# Altium PCB RASPBERRY_PI_PICO.PcbDoc
Units mil, origin at the board's own origin, x right, y up, seen from the top; angles counter-clockwise.
Board outline 2127.95 x 2360.24 mil, 2 copper layers (Top Layer, Bottom Layer); 5 components, 28 nets, 75 pads, 0 vias.
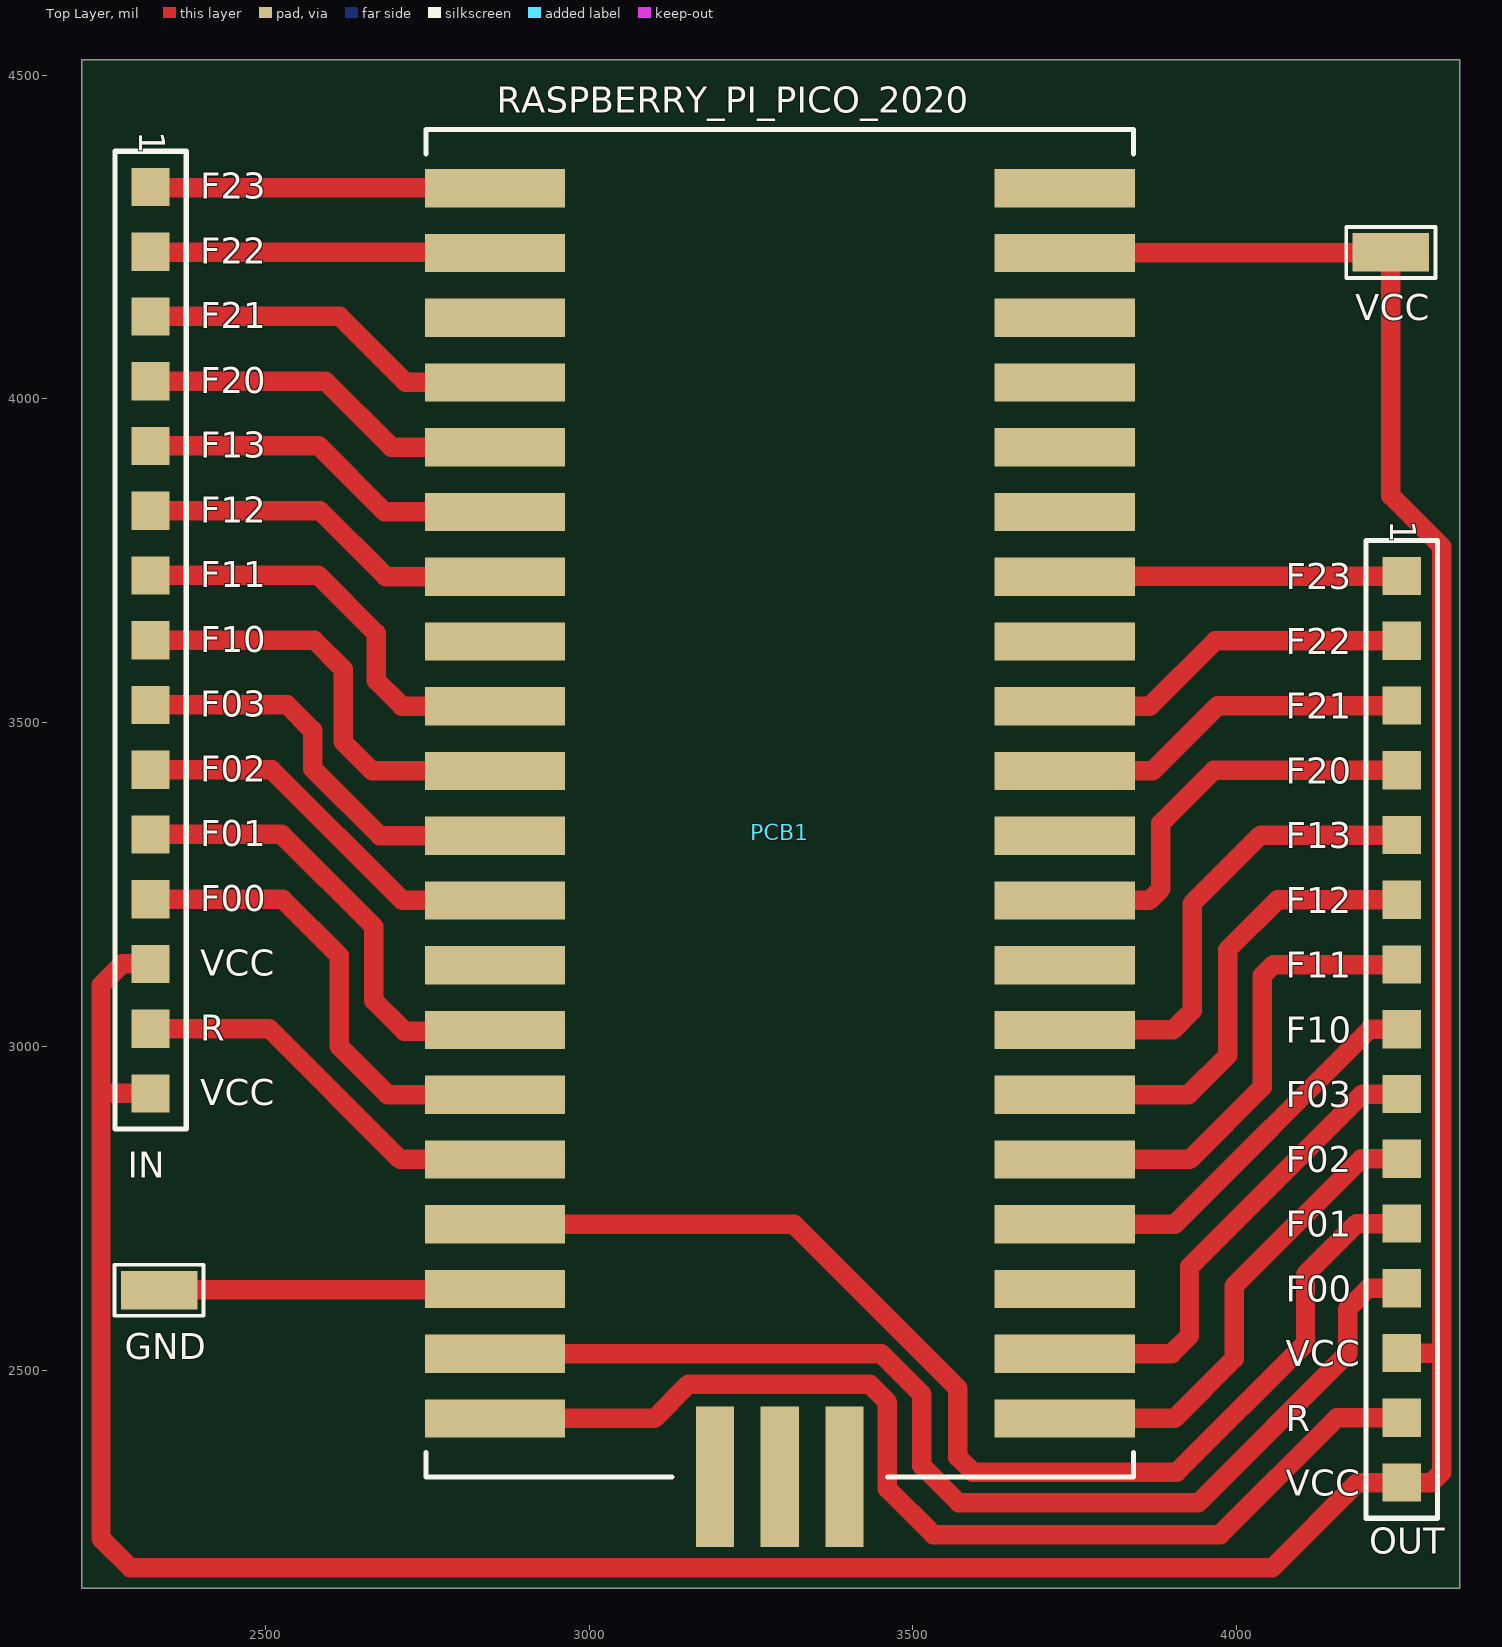
[diagram p0: Top Layer view]
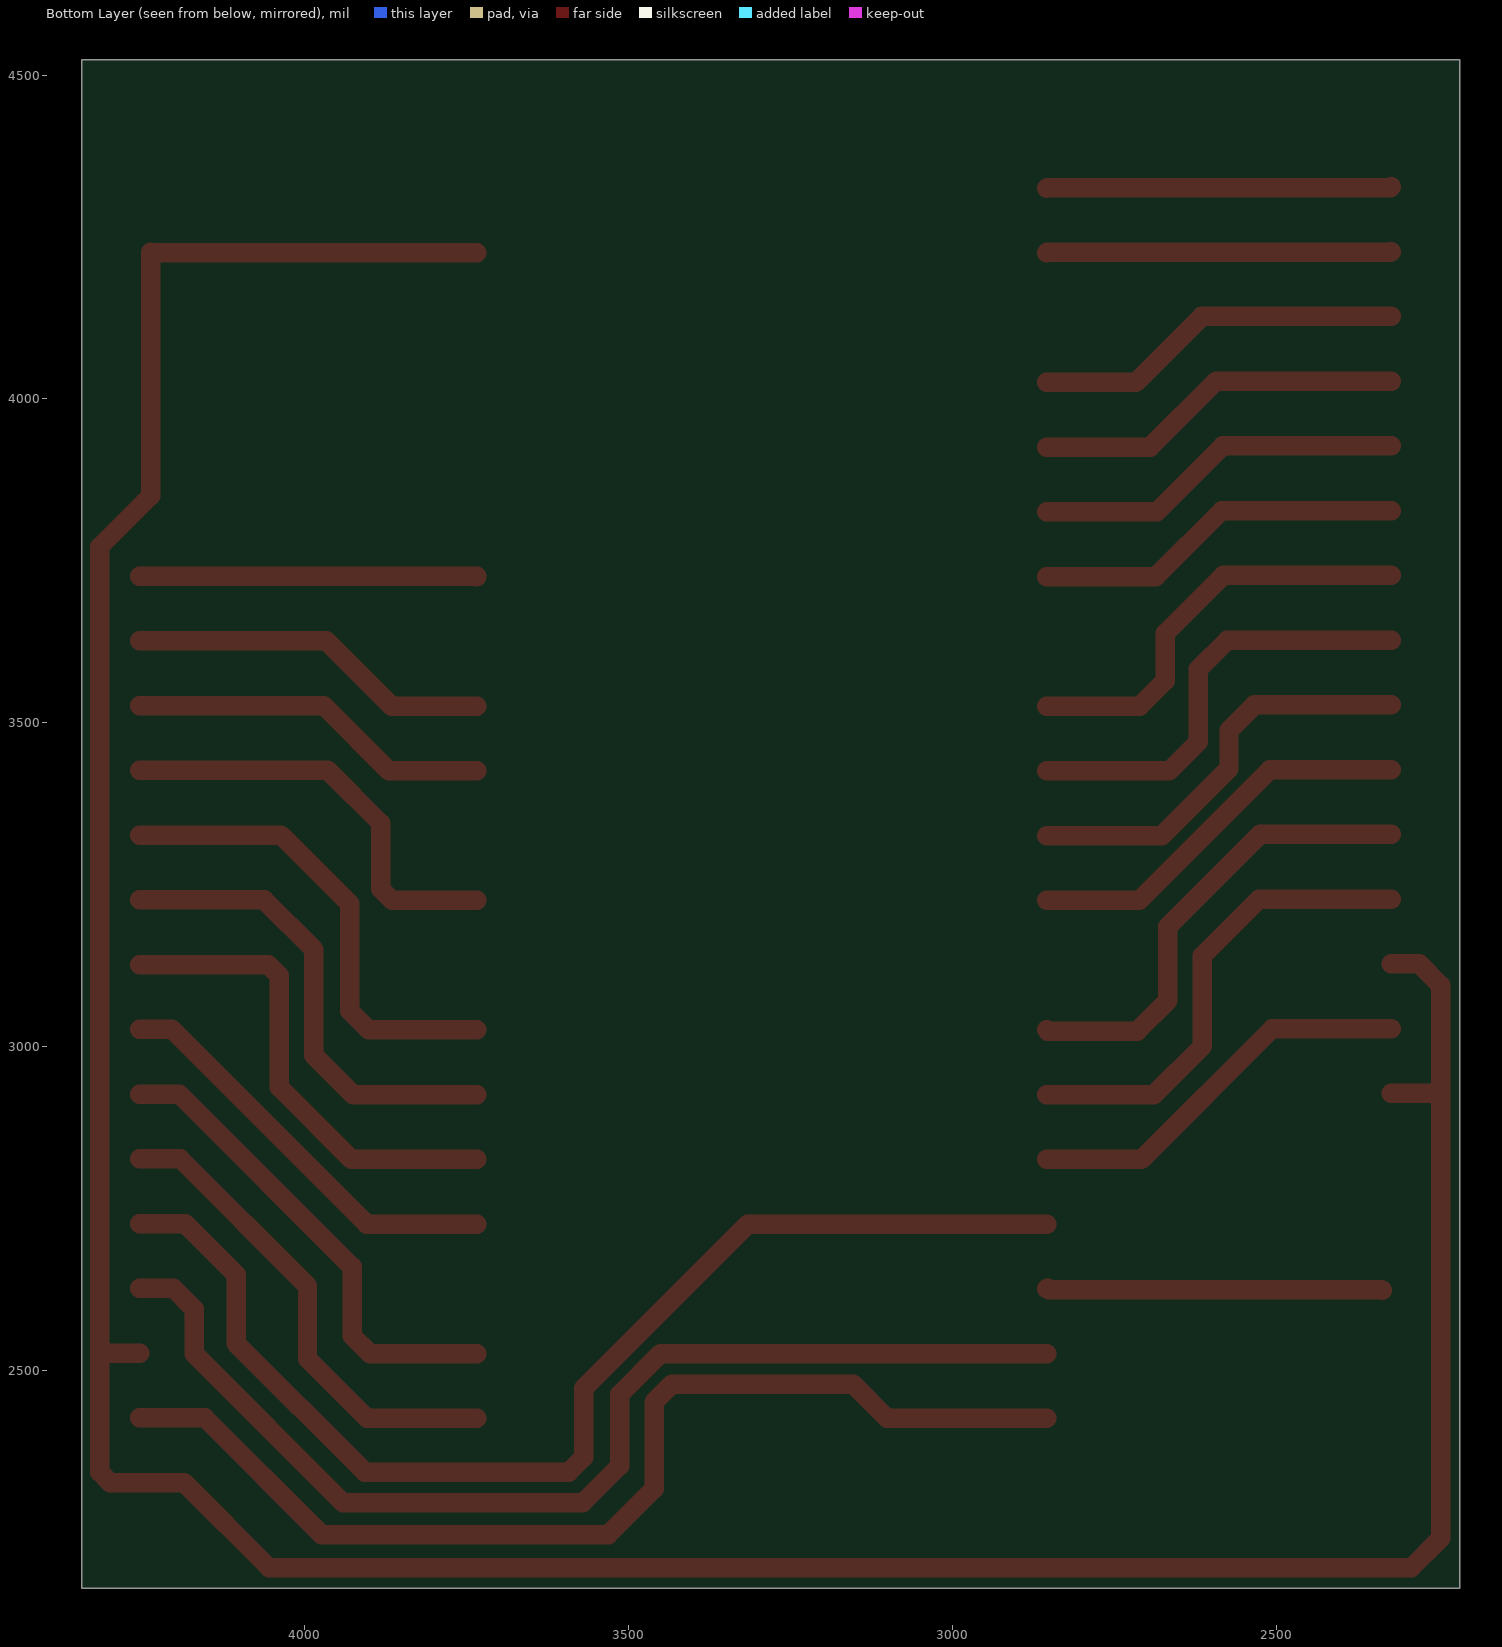
[diagram p1: Bottom Layer view, seen from below]

## Layer stack, top to bottom
Top Solder: solder mask 0.4, Solder Resist, Dk 3.5
Top Layer: signal copper 1.4
Dielectric 1: dielectric 12.6, FR-4, Dk 4.8
Bottom Layer: signal copper 1.4
Bottom Solder: solder mask 0.4, Solder Resist, Dk 3.5

## Board outline
2216.54,2163.39 4344.49,2163.39 4344.49,4523.62 2216.53,4523.62

## Design rules (kind name [scope] priority, off if disabled: settings)
BoardOutlineClearance [All] p1: gap=10.24 ignorepadtopadclearanceinfootprint=FALSE
Clearance [All] p1: gap=8 ignorepadtopadclearanceinfootprint=FALSE
MinimumSolderMaskSliver [All] p1: minsoldermaskwidth=3
PolygonConnect [All] p1: connectstyle=Relief reliefconductorwidth=10 reliefentries=4 polygonreliefangle="90 Angle" airgapwidth=10
RoutingVias [All] p1: holewidth=28 width=50 viastyle="Through Hole" minholewidth=28 minwidth=50 maxholewidth=28 maxwidth=50
SilkToSilkClearance [All] p1: silktosilkclearance=6.02
SilkToSolderMaskClearance [IsPad] p1: minsilkscreentomaskgap=6.02 clearancetoexposedcopper=TRUE
SolderMaskExpansion [All] p1: expansion=4 istentingtop=FALSE
Width [All] p1: maxlimit=40 minlimit=10 preferedwidth=40
27 further rules are at their usual default settings.

## Components (designator, comment, footprint, x,y, rotation, side; value= is the part's Value field where it differs from the comment)
GND "SMD" SMD_PAD 2335.78,2623.37 r0 top
IN "F_CONN_SMD" F_CONNECTOR_SMD 2322.57,3627.36 r270 top
OUT "F_CONN_SMD" F_CONNECTOR_SMD 4255.14,3026.42 r270 top
PCB1 "RASPBERRY_PI_PICO_2020" RASPBERRY_PI_PICO_2020\ 3294.42,3330.46 r0 top
VCC "SMD" SMD_PAD 4238.19,4226.38 r0 top

## Footprints (in the part's own frame and the unit in brackets; to place one, negate y for a bottom-side part, rotate by r counter-clockwise, add the part's x,y. Pads: shape width x height; smd on the part's side, far side on the other; paste and mask are expansions set on the pad)
F_CONNECTOR_SMD [mm]
  rect 1.5x1.5 smd: 1(-17.78,0) 2(-15.24,0) 3(-12.7,0) 4(-10.16,0) 5(-7.62,0) 6(-5.08,0) 7(-2.54,0) 8(0,0) 9(2.54,0) 10(5.08,0) 11(7.62,0) 12(10.16,0) 13(12.7,0) 14(15.24,0) 15(17.78,0)
  silkscreen extent -19.18,-1.4 19.18,1.4
RASPBERRY_PI_PICO_2020\ [mm]
  rect 5.5x1.5 smd: 1(-11.176,25.273) 2(-11.176,22.733) 3(-11.176,20.193) 4(-11.176,17.653) 5(-11.176,15.113) 6(-11.176,12.573) 7(-11.176,10.033) 8(-11.176,7.493) 9(-11.176,4.953) 10(-11.176,2.413) 11(-11.176,-0.127) 12(-11.176,-2.667) 13(-11.176,-5.207) 14(-11.176,-7.747) 15(-11.176,-10.287) 16(-11.176,-12.827) 17(-11.176,-15.367) 18(-11.176,-17.907) 19(-11.176,-20.447) 20(-11.176,-22.987) 24(11.176,-22.987) 25(11.176,-20.447) 26(11.176,-17.907) 27(11.176,-15.367) 28(11.176,-12.827) 29(11.176,-10.287) 30(11.176,-7.747) 31(11.176,-5.207) 32(11.176,-2.667) 33(11.176,-0.127) 34(11.176,2.413) 35(11.176,4.953) 36(11.176,7.493) 37(11.176,10.033) 38(11.176,12.573) 39(11.176,15.113) 40(11.176,17.653) 41(11.176,20.193) 42(11.176,22.733) 43(11.176,25.273)
  rect 1.5x5.5 smd: 21(-2.54,-25.273) 22(0,-25.273) 23(2.54,-25.273)
  silkscreen extent -13.88,-25.29 13.88,27.57
SMD_PAD [mm]
  rect 3x1.5 smd: 1(0,0)
  silkscreen extent -1.75,-1 1.75,1

## Part data
GND VCC: library part SMD_PAD
IN OUT: library part F_CONNECTOR_SMD

## Nets (pads, with @x,y where several pads share a name; then routed paths per layer and width w, separated by ;. In a path a pad name is that pad's centre, name@x,y a point inside that pad or via, vN(x,y) a via of type N, cw(c..) or ccw(c..) an arc to the next point about the centre after c; other vN are vias at no path point)
F00_IN: IN.12 PCB1.15 | length 738.8
  Top Layer w30: IN.12 2526.57,3227.36 2614.17,3139.76 2614.17,3000 2688.7,2925.47 PCB1.15
F00_OUT: OUT.12 PCB1.19 | length 1738.2
  Top Layer w30: PCB1.19 3450.91,2525.47 3513.78,2462.6 3513.78,2352.36 3570.87,2295.28 3940.94,2295.28 4171.26,2525.59 4171.26,2594.49 4203.2,2626.42 OUT.12
F01_IN: IN.11 PCB1.14 | length 725.3
  Top Layer w30: IN.11 2525,3327.36 2667.32,3185.04 2667.32,3070.87 2714.57,3023.62 2852.56,3023.62 PCB1.14
F01_OUT: OUT.11 PCB1.17 | length 1842.9
  Top Layer w30: PCB1.17 3315.79,2725.47 3569.5,2471.77 3569.5,2365.54 3592.52,2342.52 3907.48,2342.52 4106.3,2541.34 4106.3,2647.64 4185.09,2726.42 OUT.11
F02_IN: IN.10 PCB1.12 | length 615.5
  Top Layer w30: IN.10 2509.65,3427.36 2711.54,3225.47 PCB1.12
F02_OUT: OUT.10 PCB1.24 | length 752.5
  Top Layer w30: PCB1.24 3903.82,2425.47 3996.06,2517.72 3996.06,2629.92 4192.57,2826.42 OUT.10
F03_IN: IN.9 PCB1.11 | length 650.1
  Top Layer w30: IN.9 2533.66,3527.36 2572.83,3488.19 2572.83,3429.13 2676.5,3325.47 PCB1.11
F03_OUT: OUT.9 PCB1.25 | length 749.1
  Top Layer w30: PCB1.25 3899.49,2525.47 3927.17,2553.15 3927.17,2659.45 4194.14,2926.42 OUT.9
F10_IN: IN.8 PCB1.10 | length 681.2
  Top Layer w30: IN.8 2575.39,3627.36 2620.08,3582.68 2620.08,3470.47 2665.08,3425.47 PCB1.10
F10_OUT: OUT.8 PCB1.27 | length 645.4
  Top Layer w30: PCB1.27 3904.6,2725.47 4205.56,3026.42 OUT.8
F11_IN: IN.7 PCB1.9 | length 658.1
  Top Layer w30: IN.7 2581.69,3727.36 2671.26,3637.8 2671.26,3564.96 2710.75,3525.47 PCB1.9
F11_OUT: OUT.7 PCB1.28 | length 746
  Top Layer w30: PCB1.28 3927.83,2825.47 4039.37,2937.01 4039.37,3108.85 4056.94,3126.42 OUT.7
F12_IN: IN.6 PCB1.7 | length 574
  Top Layer w30: IN.6 2584.05,3827.36 2685.95,3725.47 PCB1.7
F12_OUT: OUT.6 PCB1.29 | length 741.1
  Top Layer w30: PCB1.29 3925.47,2925.47 3986.22,2986.22 3986.22,3149.61 4063.04,3226.42 OUT.6
F13_IN: IN.5 PCB1.6 | length 574
  Top Layer w30: IN.5 2582.48,3927.36 2684.37,3825.47 PCB1.6
F13_OUT: OUT.5 PCB1.30 | length 742.2
  Top Layer w30: PCB1.30 3901.45,3025.47 3931.1,3055.12 3931.1,3220.47 4037.05,3326.42 OUT.5
F20_IN: IN.4 PCB1.5 | length 574
  Top Layer w30: IN.4 2592.72,4027.36 2694.61,3925.47 PCB1.5
F20_OUT: OUT.4 PCB1.32 | length 663.4
  Top Layer w30: PCB1.32 3865.23,3225.47 3882.99,3243.22 3882.99,3344.75 3964.66,3426.42 OUT.4
F21_IN: IN.3 PCB1.4 | length 574
  Top Layer w30: IN.3 2614.76,4127.36 2716.66,4025.47 PCB1.4
F21_OUT: OUT.3 PCB1.34 | length 562.5
  Top Layer w30: PCB1.34 3734.61,3425.65 3870.12,3425.65 3970.89,3526.42 OUT.3
F22_IN: IN.2 PCB1.2 | length 532.6
  Top Layer w30: IN.2 2323.52,4226.42 2853.46,4226.42 PCB1.2
F22_OUT: OUT.2 PCB1.35 | length 562.5
  Top Layer w30: PCB1.35 3866.02,3525.47 3966.98,3626.42 OUT.2
F23_IN: IN.1 PCB1.1 | length 532.6
  Top Layer w30: IN.1 2323.52,4326.42 2853.46,4326.42 PCB1.1
F23_OUT: OUT.1 PCB1.37 | length 521.1
  Top Layer w30: PCB1.37 3734.9,3725.95 4254.66,3725.95 OUT.1
GND: GND.1 PCB1.18 | length 520.6
  Top Layer w30: GND.1 2336.83,2624.42 2850.6,2624.42 2853.03,2626.85 PCB1.18
R_IN: IN.14 PCB1.16 | length 615.5
  Top Layer w30: IN.14 2506.1,3027.36 2707.99,2825.47 PCB1.16
R_OUT: OUT.14 PCB1.20 | length 1672
  Top Layer w30: PCB1.20 3100.67,2425.47 3153.54,2478.35 3433.07,2478.35 3460.63,2450.79 3460.63,2316.93 3531.5,2246.06 3974.41,2246.06 4154.77,2426.42 OUT.14
VCC: IN.13 IN.15 OUT.13 OUT.15 PCB1.42 VCC.1 | length 5654.6
  Top Layer w30: IN.15 2246.26,2927.36 2246.06,2927.17 ; IN.13 2278.94,3127.36 2246.06,3094.49 2246.06,2927.17 ; PCB1.42 3734.88,4225.92 4237.73,4225.92 VCC.1 4238.19,3850.39 4316.93,3771.65 4316.93,2525.59 ; OUT.13 4316.1,2526.42 4316.93,2525.59 ; 2246.06,2927.17 2246.06,2240.16 2291.34,2194.88 4055.12,2194.88 4186.66,2326.42 OUT.15 4300.83,2326.42 4316.93,2342.52 4316.93,2525.59
pads on no net: PCB1.3 PCB1.8 PCB1.13 PCB1.21 PCB1.22 PCB1.23 PCB1.26 PCB1.31 PCB1.33 PCB1.36 PCB1.38 PCB1.39 PCB1.40 PCB1.41 PCB1.43

## Silkscreen, mask and mechanical layers (free items; w line width, h text height)
Mechanical 1:
  lines w3.94: 2216.54,2163.39 4344.49,2163.39 4344.49,4523.62 2216.54,4523.62 2216.54,2163.39 ; 4688.19,2211.02 4688.19,2211.02

## Text inside footprints (layer, text, board x,y; h text height)
IN: Top Overlay "VCC" at 2399.52,2908.95 h40; Top Overlay "VCC" at 2399.44,3108.95 h40; Top Overlay "F00" at 2399.44,3208.95 h40; Top Overlay "F01" at 2399.44,3308.95 h40; Top Overlay "F02" at 2399.44,3408.95 h40; Top Overlay "F03" at 2399.44,3508.95 h40; Top Overlay "F10" at 2399.44,3608.95 h40; Top Overlay "F11" at 2399.44,3708.95 h40; Top Overlay "F12" at 2399.44,3808.95 h40; Top Overlay "F13" at 2399.44,3908.95 h40; Top Overlay "F20" at 2399.44,4008.95 h40; Top Overlay "F21" at 2399.44,4108.95 h40; Top Overlay "F22" at 2399.44,4208.95 h40; Top Overlay "F23" at 2399.44,4308.95 h40; Top Overlay "1" at 2304.95,4413.49 h40 r270; Top Overlay "R" at 2399.44,3008.95 h40
OUT: Top Overlay "F23" at 4076.1,3706.04 h40; Top Overlay "VCC" at 4076.18,2306.05 h40; Top Overlay "VCC" at 4076.1,2506.04 h40; Top Overlay "F00" at 4076.1,2606.04 h40; Top Overlay "F01" at 4076.1,2706.04 h40; Top Overlay "F02" at 4076.1,2806.04 h40; Top Overlay "F03" at 4076.1,2906.04 h40; Top Overlay "F10" at 4076.1,3006.04 h40; Top Overlay "F11" at 4076.1,3106.04 h40; Top Overlay "F12" at 4076.1,3206.04 h40; Top Overlay "F13" at 4076.1,3306.04 h40; Top Overlay "F20" at 4076.1,3406.04 h40; Top Overlay "F21" at 4076.1,3506.04 h40; Top Overlay "F22" at 4076.1,3606.04 h40; Top Overlay "1" at 4237.52,3812.55 h40 r270; Top Overlay "R" at 4076.1,2406.04 h40